# Altium PCB Mppt_PCB1.PcbDoc
Units mil, origin at the board's own origin, x right, y up, seen from the top; angles counter-clockwise.
Board outline 6000 x 4000 mil, 2 copper layers (Top Layer, Bottom Layer); 61 components, 40 nets, 199 pads, 40 vias.
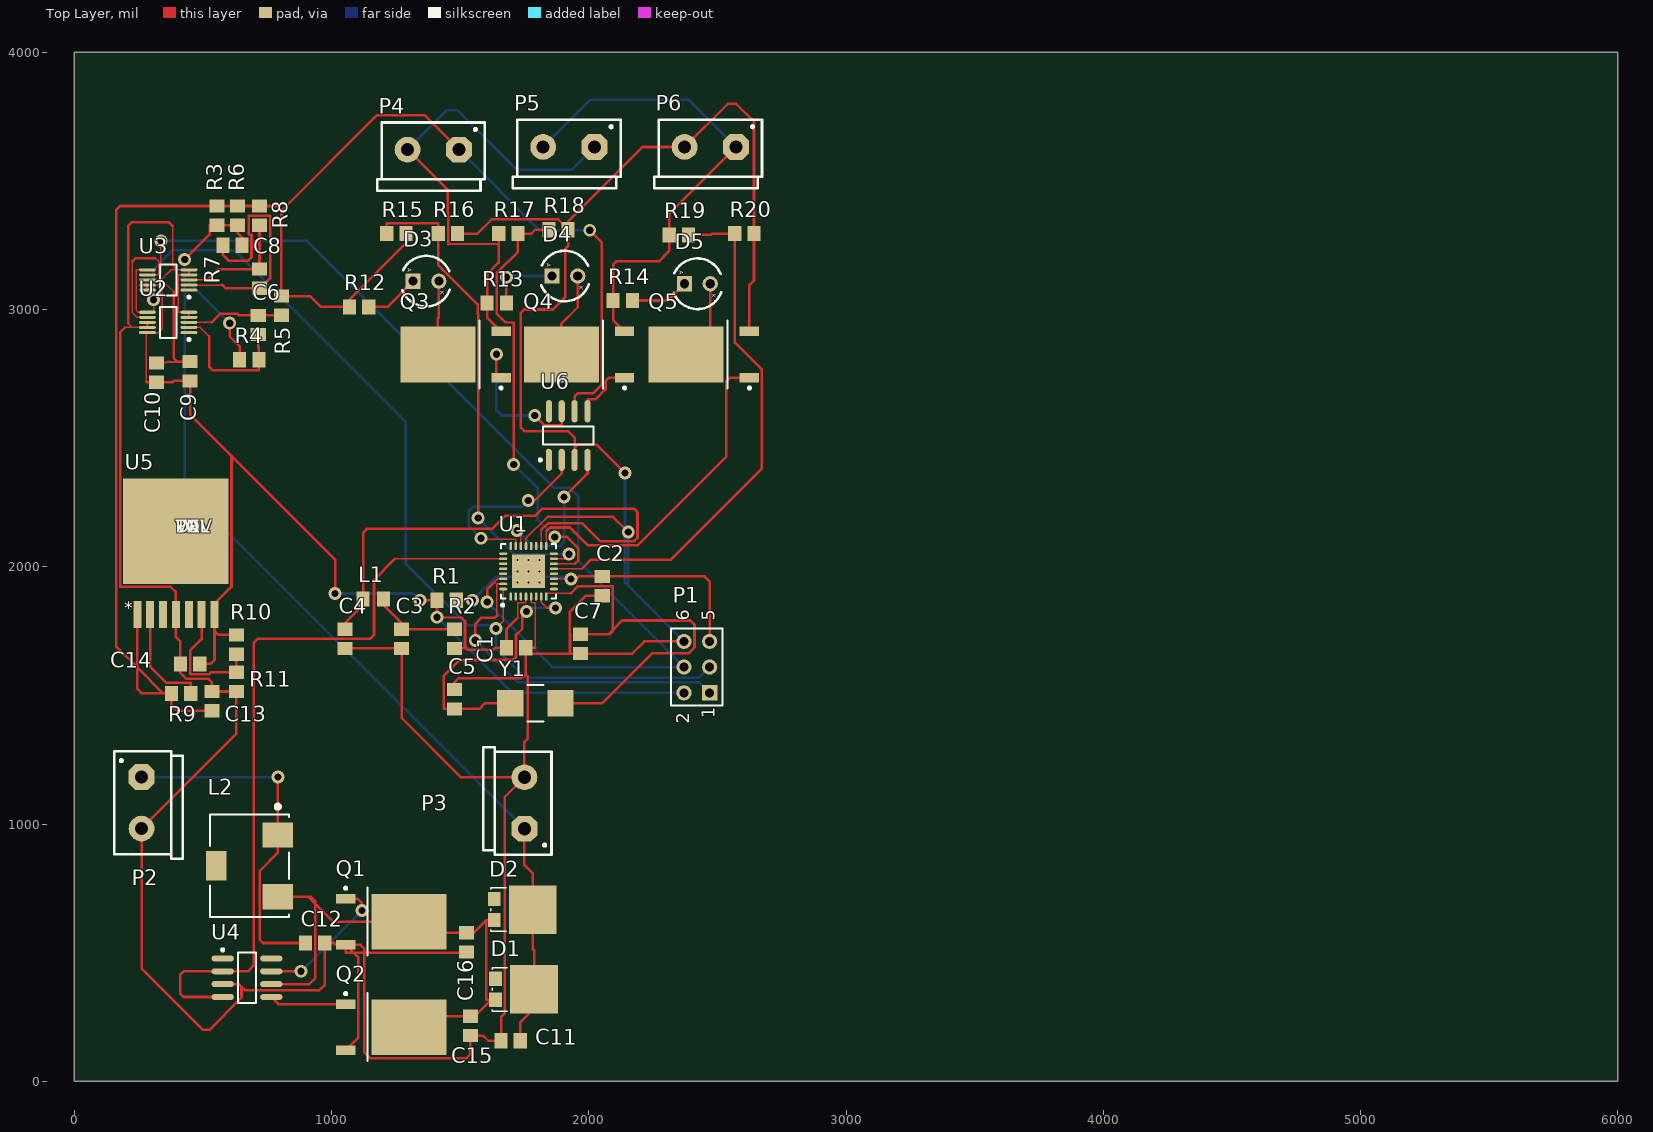
[diagram p0: Top Layer view]
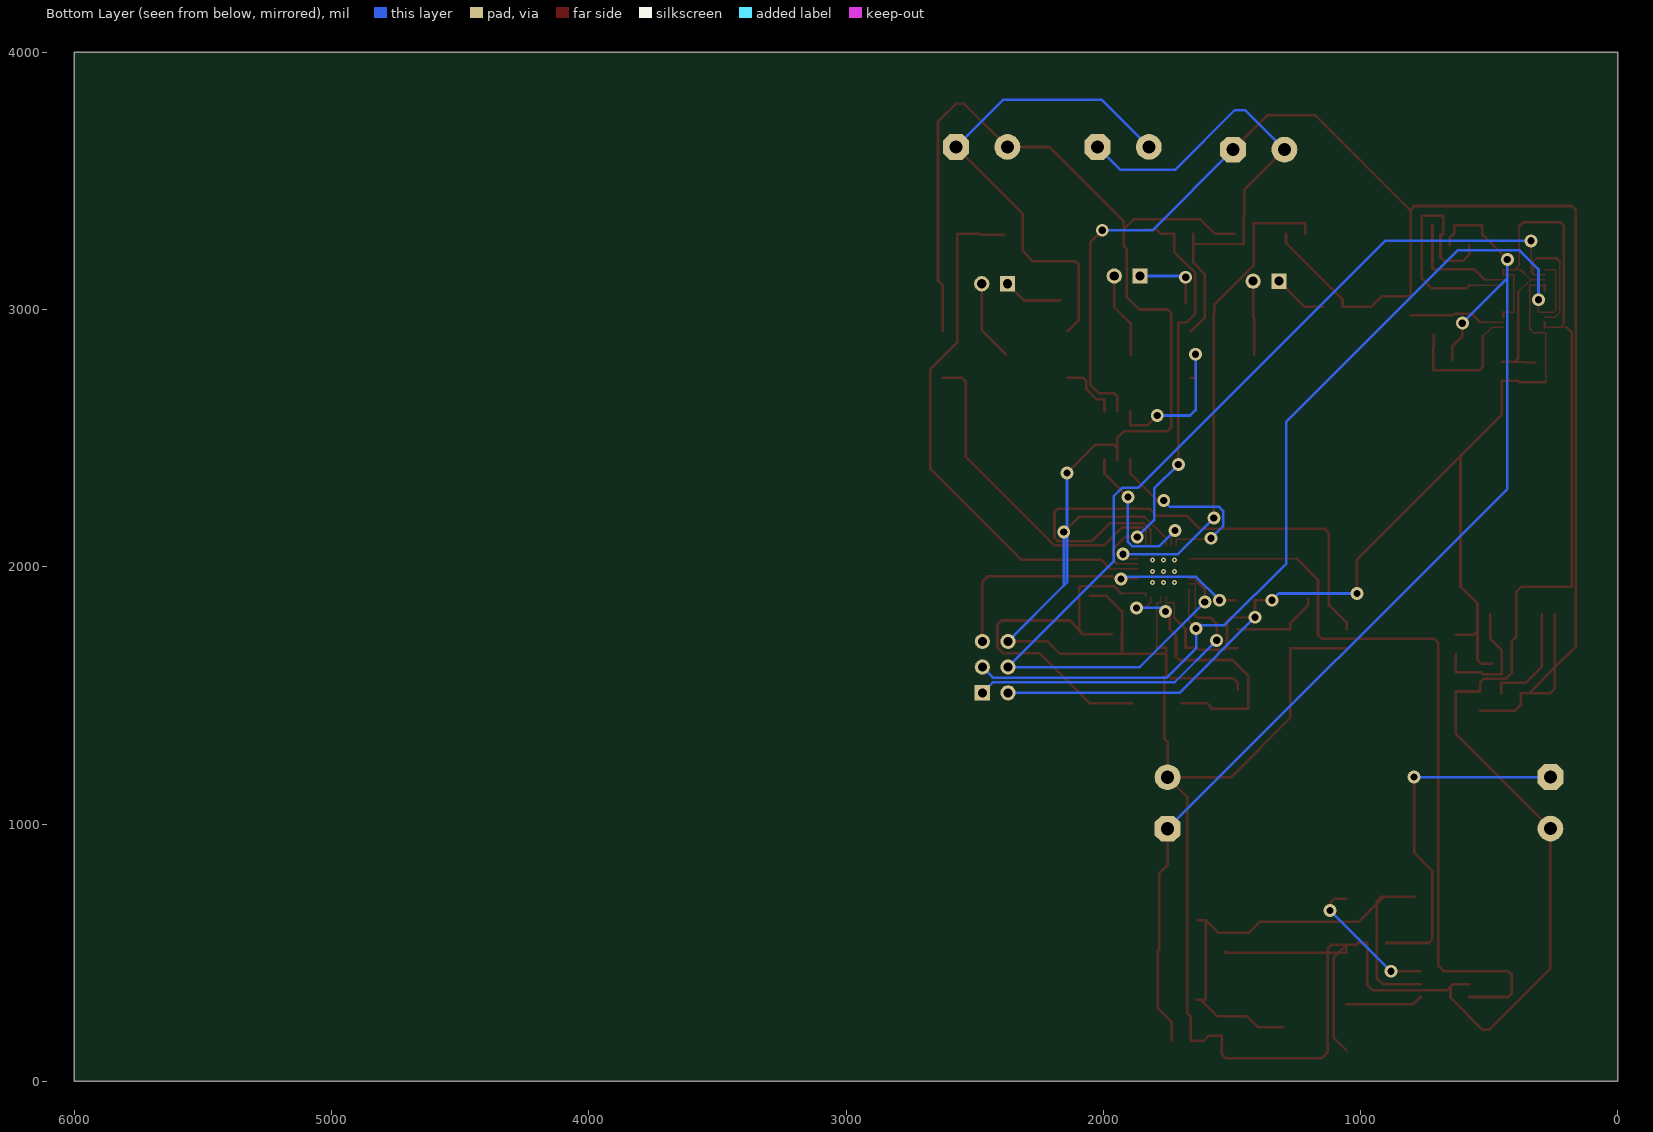
[diagram p1: Bottom Layer view, seen from below]
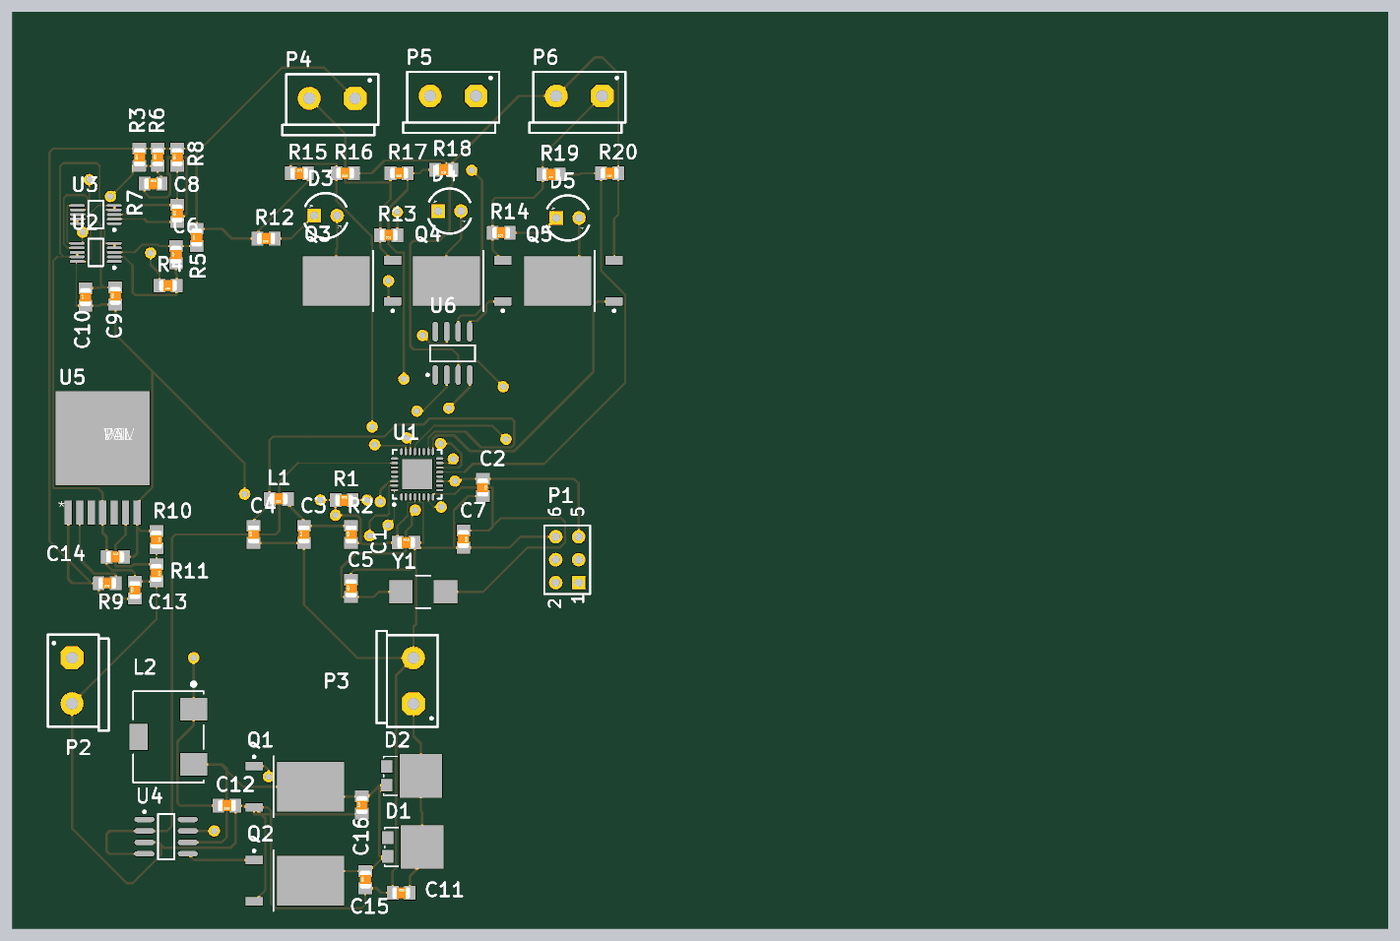
[diagram p2: 3D render of the assembled board from above, using the file's embedded part models]

## Layer stack, top to bottom
Top Solder: solder mask 0.4, Solder Resist, Dk 3.5
Top Layer: signal copper 1.4
Dielectric 1: dielectric 12.6, FR-4, Dk 4.8
Bottom Layer: signal copper 1.4
Bottom Solder: solder mask 0.4, Solder Resist, Dk 3.5

## Board outline
0,0 6000,0 6000,4000 0,4000

## Design rules (kind name [scope] priority, off if disabled: settings)
Clearance [All] p1: gap=6
PolygonConnect [All] p1: connectstyle=Relief reliefconductorwidth=10 reliefentries=4 polygonreliefangle="90 Angle" airgapwidth=10
RoomDefinition Balancer [InComponentClass('Balancer')] p1: confinementstyle=ConfineIn formatcopy=TRUE lockcomponents=FALSE outline 2725,2305 2725,3795 895,3795 895,2305
RoomDefinition Mppt_Sheet1 [InComponentClass('Mppt_Sheet1')] p2: confinementstyle=ConfineIn formatcopy=TRUE lockcomponents=FALSE outline 2605,1340 2605,2275 892.52,2275 892.52,1340
RoomDefinition CurrentSensor [InComponentClass('CurrentSensor')] p3: confinementstyle=ConfineIn formatcopy=TRUE lockcomponents=FALSE outline 875,2495 875,3600 80,3600 80,2495
RoomDefinition Buck [InComponentClass('Buck')] p4: confinementstyle=ConfineIn formatcopy=TRUE lockcomponents=FALSE outline 85,1360 865,1360 865,2475 85,2475
RoomDefinition Boost [InComponentClass('Boost')] p5: confinementstyle=ConfineIn formatcopy=TRUE lockcomponents=FALSE outline 83.09,31.66 1923.09,31.66 1923.09,1332.4 83.09,1332.4
RoutingVias [All] p1: holewidth=28 width=50 viastyle="Through Hole" minholewidth=28 minwidth=50 maxholewidth=28 maxwidth=50
SMDNeckDown [All] p1: percent=50.000
SolderMaskExpansion [All] p1: expansion=4
Width [All] p1: maxlimit=10 minlimit=4.92 preferedwidth=10
29 further rules are at their usual default settings.

## Classes and differential pairs
component class Balancer: D3 D4 D5 P4 P5 P6 Q3 Q4 Q5 R12 R13 R14 R15 R16 R17 R18 R19 R20 U6
component class Boost: C11 C12 C15 C16 D1 D2 L2 P2 P3 Q1 Q2 U4
component class Buck: C13 C14 R9 R10 R11 U5
component class CurrentSensor: C6 C8 C9 C10 R3 R4 R5 R6 R7 R8 U2 U3
component class Mppt_Sheet1: C1 C2 C3 C4 C5 C7 L1 P1 R1 R2 U1 Y1
net class Power: GND NetC12_2 NetC13_1 NetP4_2

## Components (designator, comment, footprint, x,y, rotation, side; value= is the part's Value field where it differs from the comment)
C1 "Cap_cer_100n_50V" _0805 1717.52,1685 r0 top
C2 "Cap_cer_10n_50V" _0805 2052.52,1925 r270 top
C3 "Cap_cer_100n_50V" _0805 1272.52,1720 r90 top
C4 "Cap_cer_100n_50V" _0805 1052.52,1720 r90 top
C5 "Cap_cer_12p_50V" _0805 1477.52,1485 r90 top
C6 "Cap_cer_10n_50V" _0805 715,2940 r90 top
C7 "Cap_cer_12p_50V" _0805 1967.52,1700 r270 top
C8 "Cap_cer_10n_50V" _0805 720,3120 r90 top
C9 "Cap_cer_100n_50V" _0805 450,2760 r90 top
C10 "Cap_cer_100n_50V" _0805 320,2755 r90 top
C11 "Cap_cer_100n_50V" _0805 1696.42,157.4 r0 top
C12 "Cap_cer_100n_50V" _0805 936.42,537.4 r180 top
C13 "Cap_cer_10n_50V" _0805 535,1477.6 r90 top
C14 "Cap_cer_100n_50V" _0805 450,1622.6 r0 top
C15 "Cap_cer_4.7u_50V" _0805 1540,215 r90 top
C16 "Cap_cer_100n_50V" _0805 1525,540 r90 top
D1 "V10P45S" TO-277A 1746.42,357.4 r270 top
D2 "V10P45S" TO-277A 1741.42,667.4 r270 top
D3 "LED_5mm" LED_5MM 1367.17,3115.24 r270 top
D4 "LED_5mm" LED_5MM 1907.17,3135.24 r270 top
D5 "LED_5mm" LED_5MM 2422.17,3105.24 r270 top
L1 "IND_47u_0A055" COIL_0805 1162.52,1875 r180 top
L2 "HCF1007" HCF1007 681.42,837.4 r270 top
P1 "Header 3X2" HDR2X3 2470,1510 r90 top
P2 "WRTBL_2P_508" WRTBL_2P_508 253.09,1082.03 r270 top
P3 "WRTBL_2P_508" WRTBL_2P_508 1758.09,1082.03 r90 top
P4 "WRTBL_2P_508" WRTBL_2P_508 1395,3630 r180 top
P5 "WRTBL_2P_508" WRTBL_2P_508 1922.17,3640.24 r180 top
P6 "WRTBL_2P_508" WRTBL_2P_508 2472.17,3640.24 r180 top
Q1 "IRFR024N" TO-252AA_N 1232.17,620.24 r0 top
Q2 "IRFR024N" TO-252AA_N 1232.17,210.24 r0 top
Q3 "IRFR024N" TO-252AA_N 1482.17,2825.24 r180 top
Q4 "IRFR024N" TO-252AA_N 1962.17,2825.24 r180 top
Q5 "IRFR024N" TO-252AA_N 2447.17,2825.24 r180 top
R1 "Res_0805" _0805 1447.52,1870 r0 top
R2 "Res_0805" _0805 1477.52,1720 r90 top
R3 "Res_0805" _0805 555,3365 r90 top
R4 "Res_0805" _0805 680,2805 r180 top
R5 "Res_0805" _0805 805,3015 r90 top
R6 "Res_0805" _0805 635,3365 r90 top
R7 "Res_0805" _0805 615,3250 r0 top
R8 "Res_0805" _0805 720,3365 r90 top
R9 "Res_0805" _0805 415,1507.6 r180 top
R10 "Res_0805" _0805 630,1697.6 r270 top
R11 "Res_0805" _0805 630,1552.6 r270 top
R12 "Res_0805" _0805 1107.17,3010.24 r180 top
R13 "Res_0805" _0805 1642.17,3025.24 r180 top
R14 "Res_0805" _0805 2132.17,3035.24 r180 top
R15 "Res_0805" _0805 1252.17,3295.24 r0 top
R16 "Res_0805" _0805 1452.17,3295.24 r180 top
R17 "Res_0805" _0805 1687.17,3295.24 r180 top
R18 "Res_0805" _0805 1882.17,3310.24 r180 top
R19 "Res_0805" _0805 2350,3290 r180 top
R20 "Res_0805" _0805 2605,3295 r180 top
U1 "ATtiny26L-8MU" 32M1-A_N 1765.83,1982.4 r90 top
U2 "MAX9611AUB+" MAXM-U10+2_N 365,2950 r180 top
U3 "MAX9611AUB+" MAXM-U10+2_N 365,3115 r180 top
U4 "MAX4427ESA" NSO8_N 671.42,402.4 r0 top
U5 "LMZ12001_NDW_7" TZA07A 395,2132.6 r0 top
U6 "MAX4427ESA" NSO8_N 1920,2510 r90 top
Y1 "Crystal_16.0MHz" XTAL_SMD 1792.52,1470 r180 top

## Footprints (in the part's own frame and the unit in brackets; to place one, negate y for a bottom-side part, rotate by r counter-clockwise, add the part's x,y. Pads: shape width x height; smd on the part's side, far side on the other; paste and mask are expansions set on the pad)
32M1-A_N [mm] "QFN, 32-Leads, Body 5x5mm, Pitch 0.5mm, Thermal Pad 3.3x3.3mm, IPC Medium Density"
  oval 0.8x0.25 smd: 1(-2.5,1.75) 2(-2.5,1.25) 3(-2.5,0.75) 4(-2.5,0.25) 5(-2.5,-0.25) 6(-2.5,-0.75) 7(-2.5,-1.25) 8(-2.5,-1.75) 17(2.5,-1.75) 18(2.5,-1.25) 19(2.5,-0.75) 20(2.5,-0.25) 21(2.5,0.25) 22(2.5,0.75) 23(2.5,1.25) 24(2.5,1.75)
  oval 0.25x0.8 smd: 9(-1.75,-2.5) 10(-1.25,-2.5) 11(-0.75,-2.5) 12(-0.25,-2.5) 13(0.25,-2.5) 14(0.75,-2.5) 15(1.25,-2.5) 16(1.75,-2.5) 25(1.75,2.5) 26(1.25,2.5) 27(0.75,2.5) 28(0.25,2.5) 29(-0.25,2.5) 30(-0.75,2.5) 31(-1.25,2.5) 32(-1.75,2.5)
  rect 3.3x3.3 smd: 33(0,0)
  silkscreen extent -3.47,-2.7 2.7,2.7, body extent -2.55,-2.55 2.55,2.55, height 1
_0805 [mm]
  rect 1.3x1.5 smd: 1(-0.95,0) 2(0.95,0)
  body extent -1,-0.64 1,0.62, height 0.78
COIL_0805 [mm]
  rect 1.3x1.5 smd: 1(-1.014,0) 2(1.014,0)
  body extent -1,-0.64 1,0.62, height 0.78
HCF1007 [mm]
  rect 2.5x3 smd: 1(-3.05,2.8) 2(3.05,2.8)
  rect 2.9x2 smd: ""(0,-3.3)
  silkscreen extent -6.04,-3.9 5.05,3.9
HDR2X3 [mm] "Connector; Header; 3x2 Position"
  rect 1.5x1.5 hole 0.9: 1(0,0)
  round 1.5 hole 0.9: 2(0,2.54) 3(2.54,0) 4(2.54,2.54) 5(5.08,0) 6(5.08,2.54)
  silkscreen extent -1.27,-1.27 6.35,3.81, body extent -0.3,-0.29 5.38,2.84, height 7
LED_5MM [mm]
  rect 1.5x1.5 hole 0.9: 1(0.127,-1.27)
  round 1.5 hole 0.9: 2(0.127,1.27)
  silkscreen extent -2.37,-2.33 2.63,2.36, body extent -2.36,-2.49 2.62,2.5, height 8.5
MAXM-U10+2_N [mm] "SOP, 10-Leads, Body 3x3mm, Pitch 0.5mm, IPC Medium Density"
  oval 1.65x0.3 smd: 1(-2.05,1) 2(-2.05,0.5) 3(-2.05,0) 4(-2.05,-0.5) 5(-2.05,-1) 6(2.05,-1) 7(2.05,-0.5) 8(2.05,0) 9(2.05,0.5) 10(2.05,1)
  silkscreen extent -2.18,-1.53 0.82,1.82, body extent -1.55,-1.55 1.55,1.55, height 1.1
NSO8_N [mm] "SOIC, 8-Leads, Body 4.9x3.9mm, Pitch 1.27mm, IPC Medium Density"
  oval 2.2x0.6 smd: 1(-2.4,1.905) 2(-2.4,0.635) 3(-2.4,-0.635) 4(-2.4,-1.905) 5(2.4,-1.905) 6(2.4,-0.635) 7(2.4,0.635) 8(2.4,1.905)
  silkscreen extent -2.52,-2.5 0.9,2.88, body extent -2,-2.5 2,2.5, height 1.75
TO-252AA_N [mm] "D-PAK, 4-Leads, Body 6.1x6.5mm, Pitch 2.28mm, Lead Span 9.9mm, IPC Medium Density"
  rect 1.9x0.95 smd: 1(-4.5,2.28) 3(-4.5,-2.28)
  rect 7.4x5.5 smd: 4(1.75,0)
  silkscreen extent -4.62,-3.35 -2.35,3.43, body extent -2.25,-3.37 4.1,3.37, height 2.38
TO-277A [mm]
  rect 1.4x1.27 smd: 1(1.04,-2.765) 2(-1.04,-2.765)
  rect 4.8x4.72 smd: K(0,1.04)
  silkscreen extent -2.15,-3.1 2.15,-1.6
TZA07A [mil]
  rect 31x105 smd: 1(-150,-318) 2(-100,-318) 3(-50,-318) 4(0,-318) 5(50,-318) 6(100,-318) 7(150,-318)
  rect 410x410 smd: 8(0,6)
WRTBL_2P_508 [mm]
  oct 2.54x2.54 hole 1.3: 1(-2.549,0.212)
  round 2.54 hole 1.3: 2(2.531,0.212)
  silkscreen extent -5.11,-2.47 5.51,4.29, body extent -4.83,-2.41 5.21,4.27, height 13.97
XTAL_SMD [mm]
  rect 2.6x2.6 smd: 1(-2.476,0) 2(2.476,0)
  silkscreen extent -0.8,-1.8 0.8,1.8, body extent -2.4,-1.8 2.4,1.8, height 1.4

## Part data
C1 C3 C4 C9 C10 C11 C12 C14 C15 C16: library part Cap_124
C2 C6 C8 C13: library part Cap_120
C5 C7: library part Cap_109
D1 D2: "V01P45 Shottky Diode"
D3 D4 D5: library part DIODE_41
L1: library part Ind_41, "Inductor"
L2: "HCF1007 Inductor"
P1: library part Con_41
P2 P3 P4 P5 P6: library part Con_7
Q1 Q2 Q3 Q4 Q5: "HEXFET N-Channel Power MOSFET"
R1 R2 R3 R4 R5 R6 R7 R8 R9 R10 R11 R12 R13 R14 R15 R16 R17 R18 R19 R20: library part Res_6
U1: "8-bit AVR Microcontroller, 2.7-5.5V, 8MHz, 2KB Flash, 128 Bytes EEPROM, 128 Bytes SRAM, 32-pin MLF, Industrial Grade (-40°C to 85°C), Pb-Free"
U2 U3: "High-side Current-Sense Amplifier with 12-bit I2C ADC and Op Amp / Comparator - Non-inverting, Adjustable Gain, -40 to 125 degC, 10-Pin SOP (U10+2), Pb-Free"
U4 U6: "Dual High-Speed 1.5A MOSFET Driver"
U5: "Imported"
Y1: library part Crystal_19

## Via types
v1: diameter 50, hole 28, Top Layer to Bottom Layer, 31 vias
v2: diameter 19.68, hole 7.87, Top Layer to Bottom Layer, 9 vias

## Nets (pads, with @x,y where several pads share a name; then routed paths per layer and width w, separated by ;. In a path a pad name is that pad's centre, name@x,y a point inside that pad or via, vN(x,y) a via of type N, cw(c..) or ccw(c..) an arc to the next point about the centre after c; other vN are vias at no path point)
+5V: C1.1 C9.1 C10.1 C14.2 P1.2 R1.1 R2.1 R10.1 U1.4 U2.10 U3.9 U3.10 U5.7 | length 4985.4
  Top Layer w4.92: 1724.54,1802.38 1724.54,1858 1726,1859.46 1754.45,1859.46 1755.99,1861 U1.4
  Top Layer w5.91: 280,2718.6 280,2910.63 U2.10 327.63,2910.63 342,2925 342,3094.31 341,3095.31 U3.9
  Top Layer w10: 280,2718.6 281,2717.6 C10.1 382,2717.6 387,2722.6 C9.1 450,2592 611,2431 ; U3.10 U3.9 ; C14.2 530.1,1622.6 545,1637.5 545,1750 ; R10.1 560,1735 545,1750 ; v1(1014,1896) 1014,2028 611,2431 ; v1(1344,1870) R1.1 v1(1410.12,1803.88) 1504.5,1802 1519,1787.5 1519,1683.6 R2.1 1523.2,1682.6 1528.25,1677.55 1628.69,1677.55 1636.14,1685 C1.1 1680.12,1757.96 1724.54,1802.38 ; 545,1750 U5.7 545,1857 611,1923 611,2431
  Bottom Layer w10: v1(1014,1896) 1318,1896 v1(1344,1870) ; v1(1410.12,1803.88) 1704,1510 P1.2
GND: C1.2 C2.2 C3.1 C4.1 C5.2 C7.2 C9.2 C10.2 C11.1 C12.1 C13.2 C14.1 C15.1 C16.1 P1.6 P2.2 P3.2 P6.2 Q1.3 Q2.3 Q5.3 R11.2 R16.1 R18.1 R20.1 U1.5 U1.21 U2.4 U2.5 U2.8 U2.9 U3.4 U3.5 U3.8 U4.3 U5.4 U6.3 | length 17486.2
  Top Layer w4.92: U1.21 1755.99,2110.01 1839.97,2194 ; U1.5 1775.67,1860.9 1777,1859.57 1790.27,1859.57 1791.84,1858 1791.84,1686
  Top Layer w5.91: 196.81,2930.31 225,2930.31 ; 209,2946.31 225,2930.31 ; U2.9 225,2930.31 ; U3.8 337.5,3115 ; 382,3325 382,3172.37 400,3154.37 ; 387.2,3069.8 337.5,3115 ; U2.5 405,2989.37 404,2990.37 404,3133.69 405,3134.69 U3.4 ; U3.5 400,3154.37 ; 337.5,3115 376.87,3154.37 400,3154.37
  Top Layer w10: 196.81,2930.31 179,2912.5 179,1923 180,1922 375,1922 395,1902 U5.4 395,1726.6 412.6,1709 C14.1 412.6,1587.5 435.1,1565 520,1565 535,1550 C13.2 582,1515 582.2,1515.2 R11.2 630,1350.98 P2.2 261.42,438.58 500,200 525,200 650,325 650,367 ; 209,2946.31 209,3325 223,3339 368,3339 382,3325 ; U2.9 U2.8 ; C10.2 400,2797.4 ; 387.2,3069.8 387.2,2810.21 400,2797.4 ; U2.4 U2.5 ; U3.4 U3.5 ; C9.2 400,2797.4 ; U4.3 639.6,377.4 650,367 ; C4.1 C3.1 1272.52,1412.98 1503.84,1181.66 P3.2 ; Q2.3 1104,169.47 1104,481.47 1085.47,500 ; C5.2 1477.52,1550 1494.52,1567 1737.5,1567 1754.92,1581 ; R16.1 1567.28,3295.24 1623.04,3351 1881,3351 R18.1@1919.57,3312.43 ; C16.1 1525,500 1128,500 ; 1791.84,1686 1790.84,1685 C1.2 C1.2@1754.92,1662 ; 1839.97,2194 2095,2194 v1(2153.5,2135.5) ; U6.3 1945,2462.5 ; C2.2 1988.6,1887.6 1926,1825 1927,1662.6 ; v1(2141,2364) 2030,2475 1957.5,2475 1945,2462.5 ; P1.6 2216.4,1710 2169,1662.6 C7.2 1927,1662.6 ; Q5.3 2624.33,3095 2642.4,3113.07 R20.1 2642.4,3730.23 2572.63,3800 2540.63,3800 P6.2 2208.47,3631.91 1919.57,3343 R18.1@1919.57,3312.43 ; 650,367 663,354 952.82,354 973.82,375 C12.1 1010,537.4 1016.93,530.47 Q1.3 ; Q1.3 1085.47,500 ; Q1.3 1112.5,530.47 1128,514.97 1128,500 ; Q1.3 1055,501 1056,500 1085.47,500 ; 1085.47,500 1128,500 ; 1128,500 1128,112 1150,90 1525,90 1540,105 C15.1 1589,177.6 1609.2,157.4 C11.1 1659.02,250.02 1674,265 1674,1105.9 P3.2 ; P3.2 1749.76,1318.76 1762,1331 1762,1573.92 1754.92,1581 ; 1754.92,1581 C1.2@1754.92,1662 ; C1.2@1754.92,1662 1926,1662 1927,1662.6 ; R18.1@1919.57,3312.43 R18.1 1919.57,3246.57 1908,3235 1908,3047.5 1860.5,3000 1748.5,3000 1736,2987.5 1736,2541 1750,2527 1920,2527 1945,2502 1945,2462.5
  Bottom Layer w10: v1(2141,2364) 2141,1939 2153.5,1926.5 ; v1(2153.5,2135.5) 2153.5,1926.5 ; P1.6 2153.5,1926.5
NetC2_1: C2.1 P1.5 R1.2 U1.11 | length 1337.5
  Top Layer w4.92: U1.11 v1(1931,1952.87)
  Top Layer w10: R1.2 v1(1548,1870) ; v1(1931,1952.87) 1953,1952.87 1962.53,1962.4 C2.1 2450,1962.4 2470,1942.4 P1.5
  Bottom Layer w10: v1(1548,1870) 1639,1961 1922.87,1961 v1(1931,1952.87)
NetC3_2: C3.2 L1.1 R2.2 | length 351.6
  Top Layer w10: L1.1 1202.42,1851.1 1272.52,1781 C3.2 R2.2
NetC4_2: C4.2 L1.2 U1.18 | length 2095.9
  Top Layer w4.92: U1.18 1815.04,2142.04
  Top Layer w10: C4.2 1052.52,1781 1122.62,1851.1 L1.2 1122.62,2132.12 1137.5,2147 1624,2147 1676,2199 1793,2199 1820,2226 2176,2226 2189.5,2212.5 2189.5,2112.5 2176.5,2099.5 2044.55,2099.5 1975.3,2168.75 1841.75,2168.75 1815.04,2142.04
NetC5_1: C5.1 U1.7 Y1.2 | length 1105.9
  Top Layer w4.92: U1.7 1815.04,1862.46 1837.5,1840
  Top Layer w10: Y1.2 1597.4,1470 1575,1447.6 C5.1 1437,1447.6 1436,1576 1497.5,1637.5 1704.5,1637.5 1717,1650 1717,1734 1742,1759 1742,1810 v1(1758,1826) ; 1837.5,1840 v1(1871,1840)
  Bottom Layer w10: v1(1758,1826) 1772,1840 v1(1871,1840)
NetC6_1: C6.1 R4.1 U2.2 | length 548.8
  Top Layer w5.91: U2.2 490,2930.31 525,2895.31
  Top Layer w10: 525,2895.31 525,2776.5 537.5,2764 716.4,2764 R4.1 717.4,2852 715,2854.4 C6.1
NetC6_2: C6.2 R5.1 U2.3 | length 376
  Top Layer w5.91: U2.3 534.2,2950
  Top Layer w10: 534.2,2950 567.94,2983.74 633.6,2983.74 639.94,2977.4 C6.2 759,2977.4 759.2,2977.6 R5.1
NetC7_1: C7.1 U1.8 Y1.1 | length 1652.6
  Top Layer w4.92: U1.8 1834.73,1897 1931,1897
  Top Layer w10: Y1.1 2053,1470 2246,1663 2387.5,1663 2411,1686.5 2411,1775 2395,1791 2130,1791 2094,1755 ; 1931,1897 1959,1925 2093,1925 2094,1924 2094,1755 ; C7.1 2076.4,1737.4 ; 2076.4,1737.4 2094,1755 ; 2076.4,1737.4 2081.4,1737.4 2094,1750 2094,1755
NetC8_1: C8.1 R7.1 U3.2 | length 996.4
  Top Layer w5.91: U3.2 576,3095.31
  Top Layer w10: 576,3095.31 588.72,3082.6 C8.1 723.6,3082.6 761,3120 761,3364 760,3365 680,3365 679,3364 679,3292 680,3291 688,3291 689,3290 689,3203 676,3190 600,3190 577.6,3212.4 R7.1
NetC8_2: C8.2 R8.1 U3.3 | length 462.1
  Top Layer w5.91: U3.3 516,3115
  Top Layer w10: 516,3115 558.4,3157.4 C8.2 R8.1
NetC11_2: C11.2 D1.K D2.K P3.1 R3.1 R4.2 R6.1 R7.2 | length 4394.5
  Top Layer w10: v1(429,3194) 526,3291 526,3327.6 R3.1 R6.1 635,3297.4 652.4,3280 R7.2 ; v1(604,2947) 604,2896.19 642.6,2857.59 R4.2 ; C11.2 1733.82,230 1787.36,283.54 D1.K 1787.36,509 1782.36,514 D2.K 1782.36,808 1749.76,840.6 P3.1
  Bottom Layer w10: v1(429,3194) 429,3122 ; v1(604,2947) 429,3122 ; P3.1 429,2302.42 429,3122
NetC12_2: C12.2 L2.1 P2.1 | length 1375.1
  Top Layer w10: v1(791.65,1182.4) L2.1 791.65,888.65 721,818 721,550 733.6,537.4 C12.2
  Bottom Layer w10: P2.1 v1(791.65,1182.4)
NetC13_1: C13.1 P4.1 R3.2 R5.2 R6.2 R8.2 R9.2 R12.2 R15.2 U5.1 U6.6 | length 6584.2
  Top Layer w10: U5.1 245,1607.6 ; C13.1 399.9,1440.2 377.6,1462.5 R9.2 345,1507.6 ; R15.2 1289.57,3258.57 1069.76,3038.76 R12.2 958.17,3010.24 916,3052.4 R5.2 805,3384 ; P4.1 1361.04,3756 1177,3756 805,3384 ; U6.6 1945,2662.5 1957.5,2675 2017.94,2675 2049.94,2707 2049.94,3262.06 v1(2004,3308) ; 245,1607.6 245,1525 262.4,1507.6 345,1507.6 ; 245,1607.6 345,1507.6 ; 245,1607.6 163,1689.6 163,3387.5 177.9,3402.4 R3.2 R6.2 R8.2 790.1,3402.4 805,3387.5 805,3384
  Bottom Layer w10: P4.1 1809.04,3308 v1(2004,3308)
NetC15_2: C15.2 C16.2 D1.1 D2.1 L2.2 Q1.4 Q2.4 U4.6 | length 2142.9
  Top Layer w10: U4.6 913.4,377.4 936,400 936,690.65 ; L2.2 909.32,717.32 ; Q2.4 1399,210.24 1441.17,252.4 C15.2 1556,252.4 D1.1@1620.06,316.46 ; D2.1 1603.06,626.46 ; D1.1 D1.1@1620.06,316.46 ; 909.32,717.32 936,690.65 ; 909.32,717.32 918.68,717.32 936,700 936,690.65 ; 936,690.65 1006.41,620.24 Q1.4 1391,620.24 1433.83,577.4 C16.2 1554,577.4 1601,624.4 ; 1601,624.4 1603.06,626.46 ; 1601,624.4 1601,625.46 1602,626.46 1603.06,626.46 ; 1601,624.4 1601,317.46 1602,316.46 D1.1@1620.06,316.46
NetD3_1: D3.1 R12.1 | length 214
  Top Layer w10: R12.1 1217.17,3010.24 D3.1
NetD3_2: D3.2 Q3.4 | length 286.6
  Top Layer w10: Q3.4 1413.27,2965 1417.17,2968.9 D3.2
NetD4_1: D4.1 R13.1 | length 279.9
  Top Layer w10: R13.1 v1(1679.57,3125.57)
  Bottom Layer w10: v1(1679.57,3125.57) 1684.24,3130.24 D4.1
NetD4_2: D4.2 Q4.4 | length 331.5
  Top Layer w10: Q4.4 1893.27,2945 1957.17,3008.9 D4.2
NetD5_1: D5.1 R14.1 | length 229.5
  Top Layer w10: R14.1 2307.17,3035.24 D5.1
NetD5_2: D5.2 Q5.4 | length 313.9
  Top Layer w10: Q5.4 2472.17,2919.13 D5.2
NetP1_1: P1.1 U1.31 | length 1303.2
  Top Layer w4.92: 1643.19,1810.19 1643.19,1932 1644.38,1933.19 U1.31
  Top Layer w10: v1(1559,1714) 1559,1777.5 1583.5,1802 1635,1802 1643.19,1810.19
  Bottom Layer w10: v1(1559,1714) 1722,1551 2429,1551 P1.1
NetP1_3: P1.3 U1.32 U2.6 U3.6 | length 3869.2
  Top Layer w4.92: v1(1639,1760.5) 1667,1788.5 1667,1913.5 U1.32
  Top Layer w5.91: U3.6 241,3154.37 240,3153.37 240,2998.37 249,2989.37 U2.6 308,2989.37 v1(308,3038)
  Bottom Layer w10: v1(308,3038) 308,3156.5 381.5,3230 622,3230 1288,2564 1288,2013 1528,1773 1626.5,1773 v1(1639,1760.5) 1639,1683 1753,1569 2429,1569 P1.3
NetP1_4: P1.4 U1.30 U2.7 U3.7 | length 4475.4
  Top Layer w4.92: 1630,1937.5 1645.37,1952.87 U1.30
  Top Layer w5.91: 226,3187.5 226,2987.5 243.81,2969.69 U2.7 ; U3.7 327,3134.69 328,3135.69 ; 315.5,3200 328,3187.5 328,3135.69 ; v1(337,3267) 337,3144.69 328,3135.69
  Top Layer w10: 226,3187.5 238.5,3200 315.5,3200 ; v1(1605,1863) 1605,1912.5 1630,1937.5
  Bottom Layer w10: v1(337,3267) 904.05,3267 1864.05,2307 1926.68,2307 1959.5,2274.18 1959.5,2020.5 P1.4 1858,1610 v1(1605,1863)
NetP4_2: P4.2 P5.1 Q3.3 R13.2 R17.2 | length 1974.4
  Top Layer w10: P4.2 1452,3465.04 1453,3254 1649.76,3255 ; R17.2 1649.76,3255 ; Q3.3 1604.76,2969.57 R13.2 1604.76,3137 1649.76,3182 1649.76,3255
  Bottom Layer w10: P4.2 1448.7,3775 1488.7,3775 1720.7,3543 1933.63,3543 P5.1
NetP5_2: P5.2 P6.1 Q4.3 R14.2 R19.2 | length 1932.6
  Top Layer w10: Q4.3 2094.76,2959.57 R14.2 2094.76,3175 2107.26,3187.5 2272.5,3187.5 2312.6,3227.6 R19.2 2312.6,3371.97 P6.1
  Bottom Layer w10: P5.2 2006.63,3816 2388.44,3816 P6.1
NetQ1_1: Q1.1 U4.7 | length 548.6
  Top Layer w10: U4.7 v1(881.4,427.4) ; Q1.1 1100,710 1118,692 v1(1118,664)
  Bottom Layer w10: v1(881.4,427.4) v1(1118,664)
NetQ2_1: Q2.1 U4.5 | length 300.4
  Top Layer w10: U4.5 793.31,300 Q2.1
NetQ3_1: Q3.1 U6.7 | length 657.9
  Top Layer w10: v1(1641,2826) 1641,2735.47 Q3.1 ; v1(1790,2588) 1828,2550 1894,2550 1895,2551 U6.7
  Bottom Layer w10: v1(1641,2826) 1641,2609.5 1662.5,2588 v1(1790,2588)
NetQ4_1: Q4.1 U6.5 | length 243
  Top Layer w10: U6.5 1996,2651 2025.95,2651 2065.95,2691 2065.95,2721.95 2079.47,2735.47 Q4.1
NetQ5_1: Q5.1 U1.17 | length 1322
  Top Layer w4.92: 1834.54,2137.5 1834.54,2105.19 1834.73,2105 U1.17
  Top Layer w10: 1834.54,2137.5 1849.79,2152.75 1927.16,2152.75 1996.41,2083.5 2189,2083.5 2535,2429.5 2535,2720.47 2550,2735.47 Q5.1
NetR9_1: R9.1 U5.2 | length 426.3
  Top Layer w10: U5.2 295,1613 359,1549 451.4,1549 452.4,1548 R9.1
NetR10_2: R10.2 R11.1 U5.6 | length 504.2
  Top Layer w10: U5.6 495,1719 450,1674 450,1583 451,1582 524,1582 532,1590 R11.1 R10.2
NetR15_1: R15.1 R16.2 U1.15 | length 1928.8
  Top Layer w4.92: U1.15 v1@1906.11,2031.61
  Top Layer w10: R15.1 1214.76,3335 1215.76,3336 1413.76,3336 1414.76,3335 R16.2 1414.76,3173 1568,3019.76 1568,2985 1570,2983 v1(1570,2189) ; v1@1906.11,2031.61 v1(1923.5,2049)
  Bottom Layer w10: v1(1570,2189) 1710,2049 v1(1923.5,2049)
NetR17_1: R17.1 R18.2 U1.14 | length 1708
  Top Layer w4.92: U1.14 1946.43,2011.93
  Top Layer w10: v1(1708,2397.94) 1708,2949 1676.5,2950 1642,2984.5 1642,3141.5 1724.57,3224.07 R17.1 1777,3295.24 1792,3310.24 R18.2 ; v1(1868,2116) 1915,2116 1959.5,2071.5 1959.5,2025 1946.43,2011.93
  Bottom Layer w10: v1(1708,2397.94) 1802.48,2303.46 1802.48,2181.52 v1(1868,2116)
NetR19_1: R19.1 R20.2 U1.13 | length 2109.1
  Top Layer w4.92: U1.13 1973.24,1992.24
  Top Layer w10: 1973.24,1992.24 2009,2028 2319,2028 2673,2382 2673,2766 2567.6,2871.4 R20.2 2480,3295 2475,3290 R19.1
NetU1_22: U1.22 U6.4 | length 638.3
  Top Layer w4.92: U1.22 v1@1736.3,2125.7
  Top Layer w10: v1(1721,2141) v1@1736.3,2125.7 ; v1(1904,2271) 1995,2362 U6.4
  Bottom Layer w10: v1(1721,2141) 1782,2080 1887.5,2080 1904,2096.5 v1(1904,2271)
NetU1_23: U1.23 U6.2 | length 762.6
  Top Layer w4.92: v1@1583.96,2107.54 1715.08,2107.54 1716.62,2106 U1.23
  Top Layer w10: v1(1580.5,2111) v1@1583.96,2107.54 ; v1(1765,2258) 1790,2258 1895,2363 U6.2
  Bottom Layer w10: v1(1580.5,2111) 1534,2157.5 1534,2217 1550,2233 1740,2233 v1(1765,2258)
NetU1_25: U1.25
NetU1_26: U1.26 U4.2 U4.4 | length 3029.8
  Top Layer w4.92: 1247.61,2031.61 U1.26
  Top Layer w10: U4.4 425,327.4 412.5,339.9 412.5,414.9 425,427.4 U4.2 675,427.4 697,449.4 697,1704.5 712.5,1720 1150,1720 1165,1735 1165,1949 1247.61,2031.61
pads on no net: D1.2 D2.2 L2. U1.1 U1.2 U1.3 U1.6 U1.9 U1.10 U1.12 U1.16 U1.19 U1.20 U1.24 U1.27 U1.28 U1.29 U1.33 U2.1 U3.1 U4.1 U4.8 U5.3 U5.5 U5.8 U6.1 U6.8
copper on no net:
  other v2: 1722.52,1939.09 1765.83,1939.09 1809.14,1939.09 1722.52,1982.4 1765.83,1982.4 1809.14,1982.4 1722.52,2025.71 1765.83,2025.71 1809.14,2025.71

## Text inside footprints (layer, text, board x,y; h text height)
D3: Top Overlay "K" at 1422.17,3070.24 h15 r270; Top Overlay "A" at 1297.17,3160.24 h15 r270
D4: Top Overlay "K" at 1962.17,3090.24 h15 r270; Top Overlay "A" at 1837.17,3180.24 h15 r270
D5: Top Overlay "K" at 2477.17,3060.24 h15 r270; Top Overlay "A" at 2352.17,3150.24 h15 r270
P1: Top Overlay "1" at 2490,1410.32 h50 r90; Top Overlay "2" at 2390,1390.32 h50 r90; Top Overlay "5" at 2490,1789.68 h50 r90; Top Overlay "6" at 2390,1789.68 h50 r90
U5: Top Overlay "TOL" at 395,2132.6 h50; Top Overlay "VAL" at 395,2132.6 h50; Top Overlay "DEV" at 395,2132.6 h50; Top Overlay "PN" at 395,2132.6 h50; Top Overlay "*" at 195,1814.6 h50; Mechanical 1 "RefDes2" at 395,2132.6 h50; Mechanical 1 "*" at 195,1814.6 h50